# Altium PCB TIMER_COUNTER_PANEL.PcbDoc
Units mm, origin at the board's own origin, x right, y up, seen from the top; angles counter-clockwise.
Board outline 50 x 50 mm, 2 copper layers (Top Layer, Bottom Layer); 21 components, 24 nets, 105 pads, 173 vias.
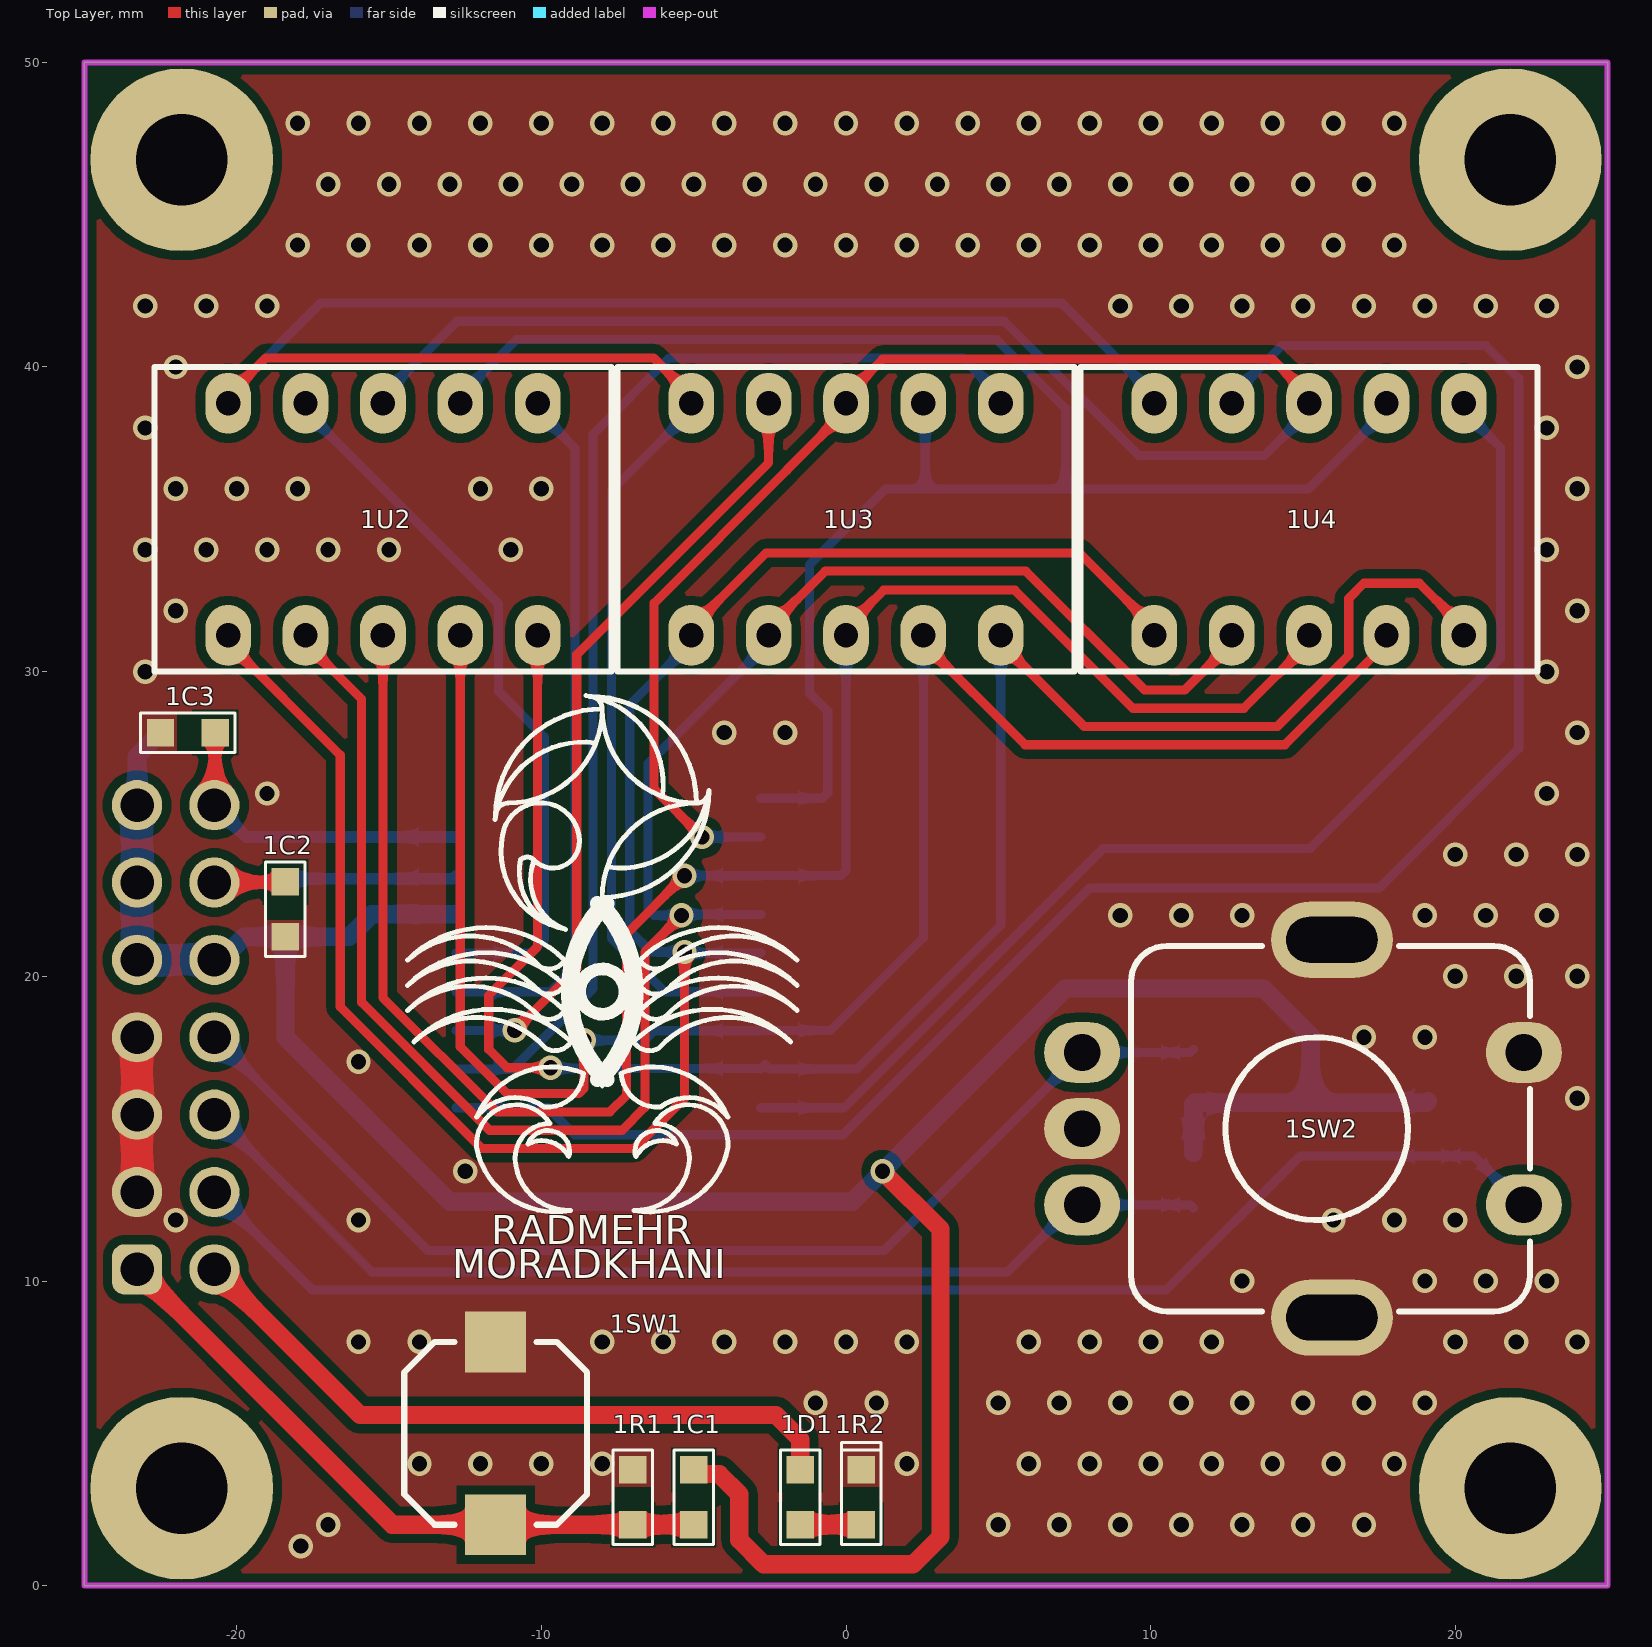
[diagram p0: Top Layer view]
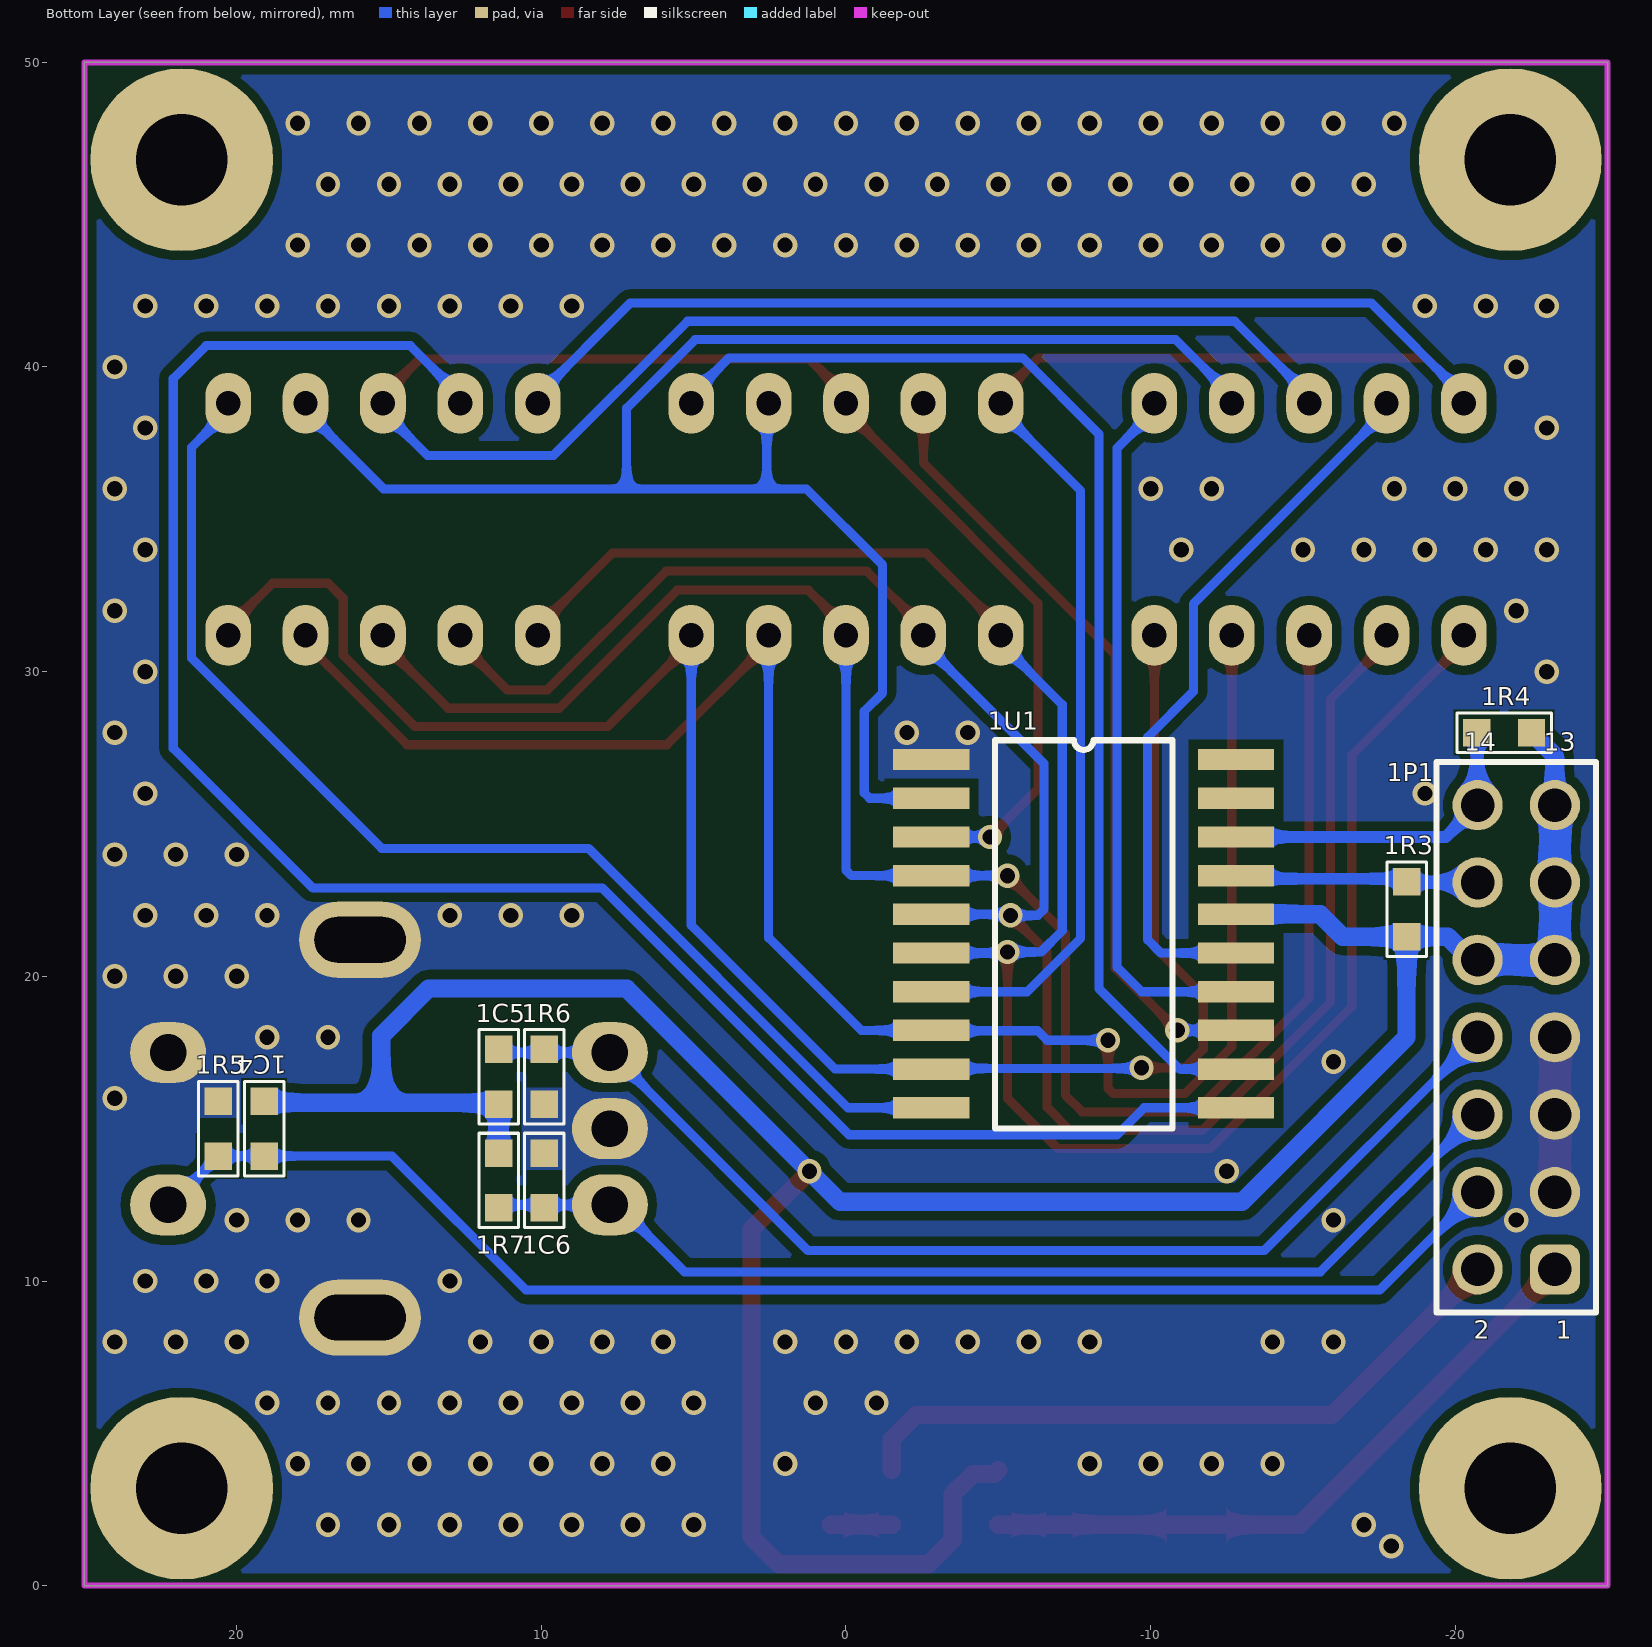
[diagram p1: Bottom Layer view, seen from below]
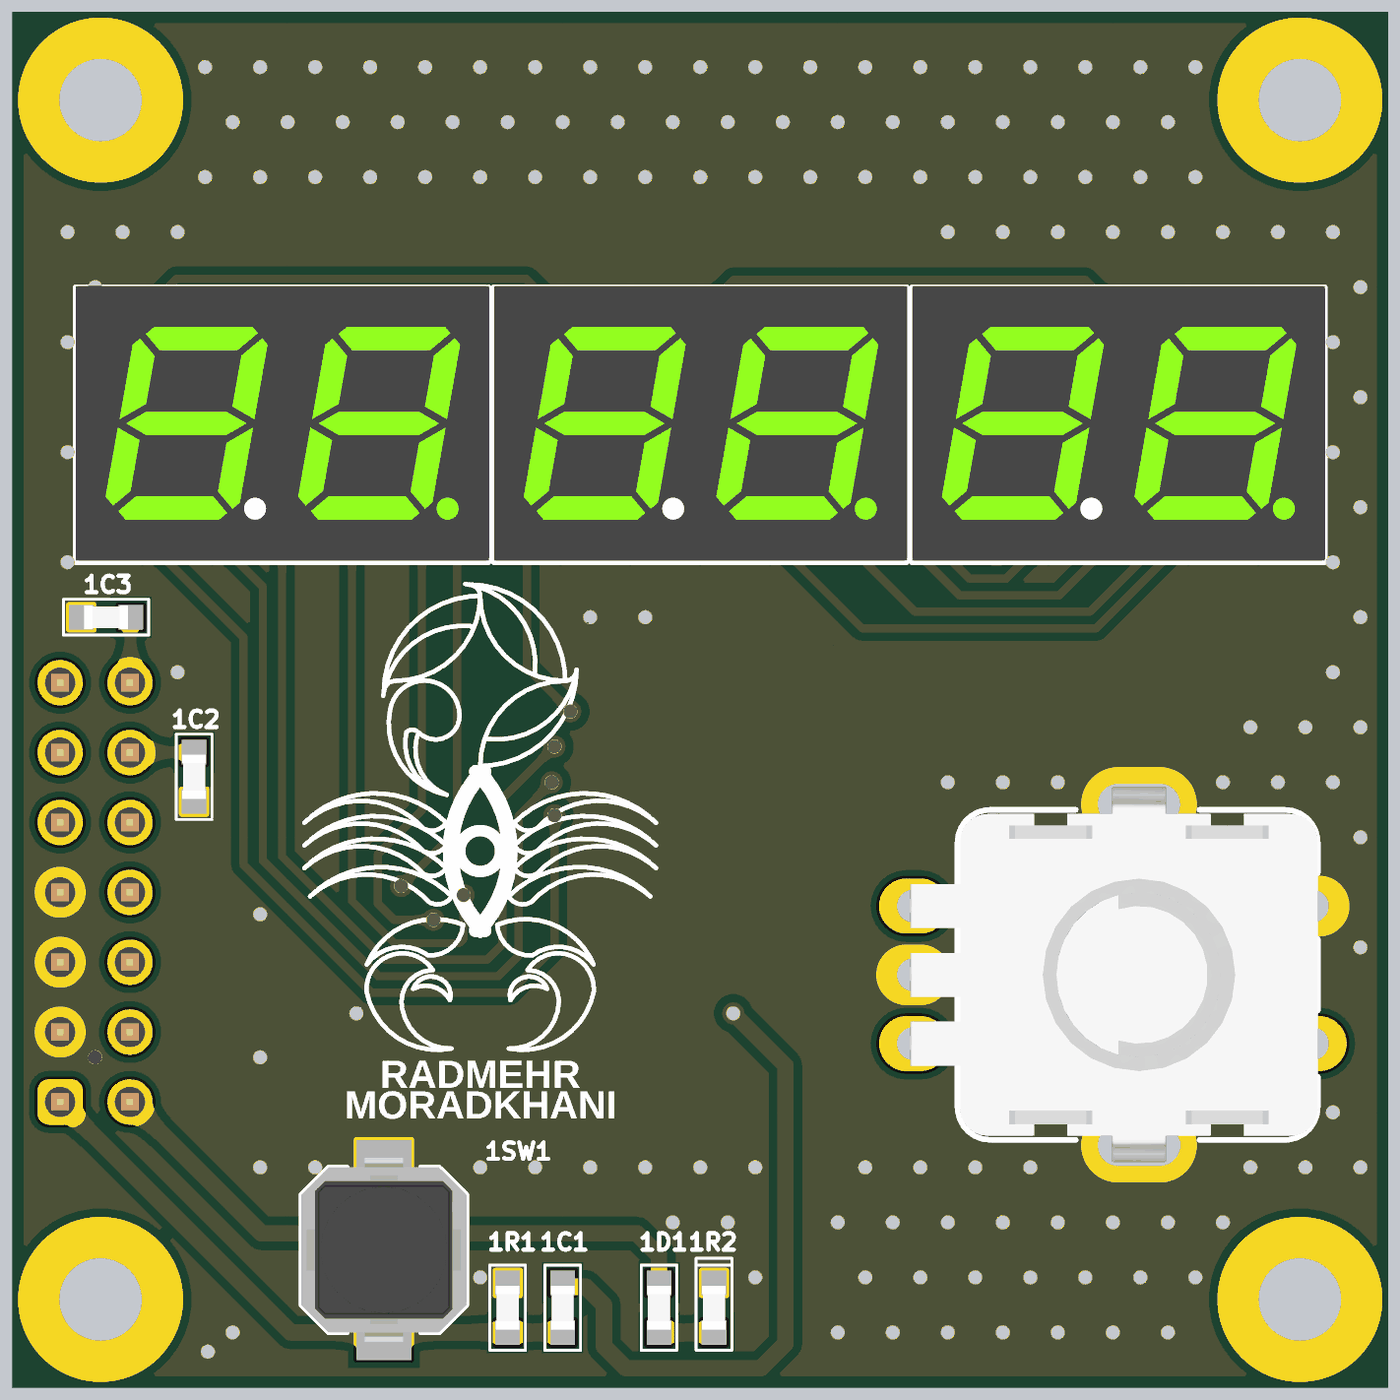
[diagram p2: 3D render of the assembled board from above, using the file's embedded part models]
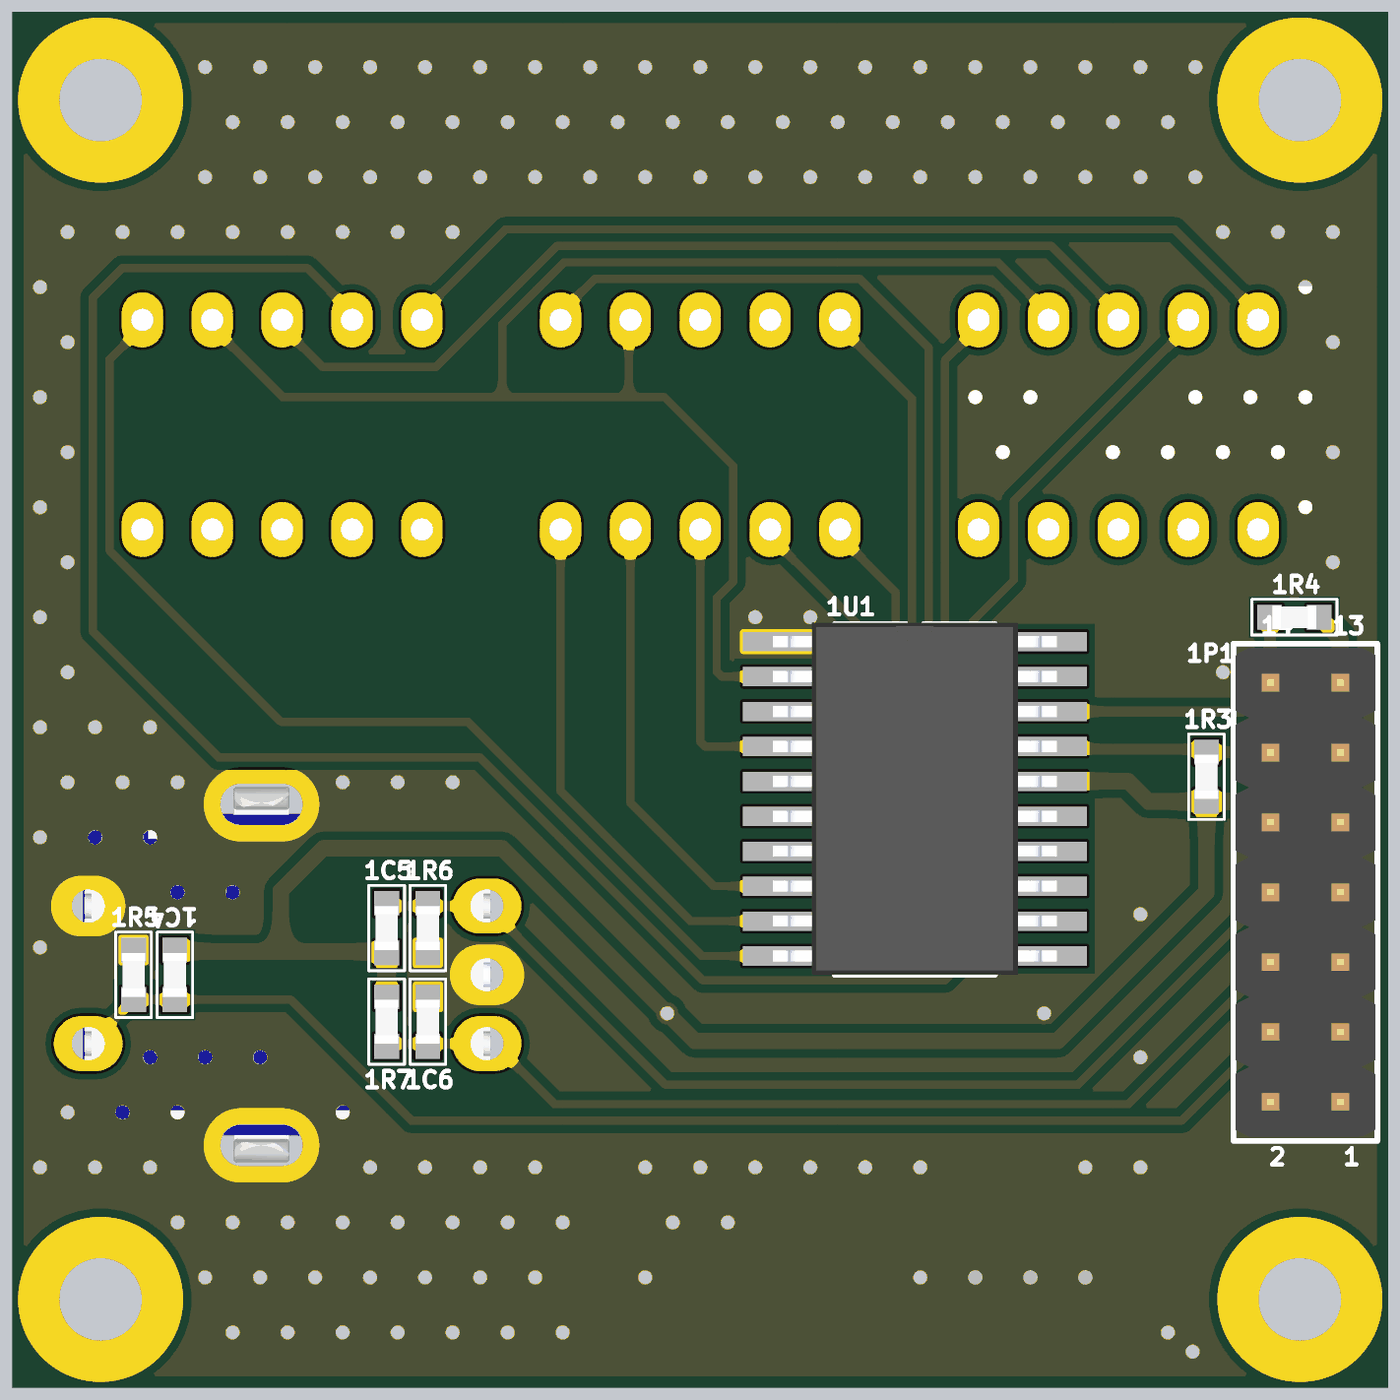
[diagram p3: 3D render of the assembled board from below, using the file's embedded part models]

## Layer stack, top to bottom
Top Solder: solder mask 0.0102, Solder Resist, Dk 3.5
Top Layer: signal copper 0.0356
Dielectric 1: dielectric 0.32, FR-4, Dk 4.8
Bottom Layer: signal copper 0.0356
Bottom Solder: solder mask 0.0102, Solder Resist, Dk 3.5

## Board outline
-25,0 25,0 25,50 -25,50

## Design rules (kind name [scope] priority, off if disabled: settings)
Clearance [All] p1: gap=0.3 ignorepadtopadclearanceinfootprint=FALSE except(0: Arc-Hole Track-Hole SMDPad-Hole THPad-Hole Via-Hole Fill-Hole Poly-Hole Region-Hole Text-Hole)
PlaneClearance [All] p1: clearance=0.5
PlaneConnect [All] p1: planeconnectstyle=Direct reliefexpansion=0.5 reliefentries=4 reliefconductorwidth=0.3 reliefairgap=0.3
PolygonConnect [All] p1: connectstyle=Direct reliefconductorwidth=0.254 reliefentries=4 polygonreliefangle="90 Angle" airgapwidth=0.254
RoomDefinition TIMER_COUNTER_PANEL_V2 [InComponentClass('TIMER_COUNTER_PANEL_V2')] p1: confinementstyle=ConfineIn formatcopy=TRUE lockcomponents=FALSE outline -95,-50 -44.2,-50 -44.2,-24.6 -95,-24.6
RoutingVias [All] p1: holewidth=0.5 width=0.8 viastyle="Through Hole" minholewidth=0.5 minwidth=0.8 maxholewidth=0.5 maxwidth=0.8
SolderMaskExpansion [All] p1: expansion=0.102 istentingtop=FALSE
Width [All] p1: maxlimit=1 minlimit=0.3 preferedwidth=0.6 minimp=50.000000 maximp=50.000000 favimp=50.000000
28 further rules are at their usual default settings.

## Components (designator, comment, footprint, x,y, rotation, side; value= is the part's Value field where it differs from the comment)
1C1 "CAP_SMD" "C 0603" -7,2.9 r270 top (schematic designator C1)
1C2 "CAP_SMD" "C 0603" -18.4,22.2 r90 top (schematic designator C2)
1C3 "CAP_SMD" "C 0603" -21.6,28 r0 top (schematic designator C3)
1C4 "CAP_SMD" "C 0603" 20.6,15 r270 bottom (schematic designator C4)
1C5 "CAP_SMD" "C 0603" 9.9,16.7 r90 bottom (schematic designator C5)
1C6 "CAP_SMD" "C 0603" 9.9,13.3 r270 bottom (schematic designator C6)
1D1 "LED_SMD" "D 0603" 0.5,2.9 r90 top (schematic designator D1)
1P1 "61301421121" 61301421121 -22,18 r90 bottom (schematic designator P1)
1R1 "RES_SMD" "R 0603" -5,2.9 r90 top (schematic designator R1)
1R2 "RES_SMD" "R 0603" -1.5,2.9 r270 top (schematic designator R2)
1R3 "RES_SMD" "R 0603" -18.4,22.2 r270 bottom (schematic designator R3)
1R4 "RES_SMD" "R 0603" -21.6,28 r180 bottom (schematic designator R4)
1R5 "RES_SMD" "R 0603" 19.1,15 r90 bottom (schematic designator R5)
1R6 "RES_SMD" "R 0603" 11.4,16.7 r270 bottom (schematic designator R6)
1R7 "RES_SMD" "R 0603" 11.4,13.3 r90 bottom (schematic designator R7)
1SW1 "430133050816" WS-TASV_L6W6H5_4301330508x6 -11.5,5 r270 top (schematic designator SW1)
1SW2 "Rotary_Encoder" Rotary_Encoder 15,15 r0 top (schematic designator SW2)
1U1 "TM1637" SOP-20 -7.8,21.4 r180 bottom (schematic designator U1)
1U2 "2281BS" 2281BS -15.2,35 r0 top (schematic designator U2)
1U3 "2281BS" 2281BS 0,35 r0 top (schematic designator U3)
1U4 "2281BS" 2281BS 15.2,35 r0 top (schematic designator U4)

## Footprints (in the part's own frame and the unit in brackets; to place one, negate y for a bottom-side part, rotate by r counter-clockwise, add the part's x,y. Pads: shape width x height; smd on the part's side, far side on the other; paste and mask are expansions set on the pad)
2281BS [mm] "U?"
  oval 1.5x2 hole 0.8: 1(-5.08,-3.81) 2(-2.54,-3.81) 3(0,-3.81) 4(2.54,-3.81) 5(5.08,-3.81) 6(5.08,3.81) 7(2.54,3.81) 8(0,3.81) 9(-2.54,3.81) 10(-5.08,3.81)
  silkscreen extent -7.5,-5 7.5,5, body extent -7.49,-4.95 7.53,5.05, height 6.35
61301421121 [mm] "Pin Header, pitch 2.54 mm, THT, Vertical, dual row, 14p"
  rrect50% 1.65x1.65 hole 1.1: 1(-7.62,-1.27)
  round 1.65 hole 1.1: 2(-7.62,1.27) 3(-5.08,-1.27) 4(-5.08,1.27) 5(-2.54,-1.27) 6(-2.54,1.27) 7(0,-1.27) 8(0,1.27) 9(2.54,-1.27) 10(2.54,1.27) 11(5.08,-1.27) 12(5.08,1.27) 13(7.62,-1.27) 14(7.62,1.27)
  silkscreen extent -9.04,-2.62 9.04,2.62, body extent -8.89,-2.54 8.89,2.54, height 8.59
"C 0603" [mm] "C?"
  rect 0.9x0.9 smd: 1(-0.9,0) 2(0.9,0)
  Top Layer pour cut-out: -0.35,0.6 0.35,0.6 0.35,-0.6 -0.35,-0.6
  silkscreen extent -1.55,-0.65 1.55,0.65, body extent -0.8,-0.43 0.8,0.43, height 0.52
"D 0603" [mm] "D?"
  rect 0.9x0.9 smd: 1(-0.9,0) 2(0.9,0)
  Top Layer pour cut-out: -0.35,0.6 0.35,0.6 0.35,-0.6 -0.35,-0.6
  silkscreen extent -1.55,-0.65 1.8,0.65, body extent -0.8,-0.43 0.8,0.43, height 0.52
"R 0603" [mm] "R?"
  rect 0.9x0.9 smd: 1(-0.9,0) 2(0.9,0)
  Top Layer pour cut-out: -0.35,0.6 0.35,0.6 0.35,-0.6 -0.35,-0.6
  silkscreen extent -1.55,-0.65 1.55,0.65, body extent -0.8,-0.43 0.8,0.43, height 0.52
Rotary_Encoder [mm] "SW?"
  oval 2.5x2 hole 1.2: 1(-7.25,2.5) 2(-7.25,0) 3(-7.25,-2.5) 4(7.25,-2.5) 5(7.25,2.5)
  oval 4x2.5 hole 1.5 slot 3 at 0 deg: 6(0.95,6.2) 7(0.95,-6.2)
  silkscreen extent -5.65,-6 7.45,6, body extent -7.38,-6.81 7.45,6.84, height 21.2
SOP-20 [mm] "U?"
  rect 2.5x0.7 smd: 1(-5,5.715) 2(-5,4.445) 3(-5,3.175) 4(-5,1.905) 5(-5,0.635) 6(-5,-0.635) 7(-5,-1.905) 8(-5,-3.175) 9(-5,-4.445) 10(-5,-5.715) 11(5,-5.715) 12(5,-4.445) 13(5,-3.175) 14(5,-1.905) 15(5,-0.635) 16(5,0.635) 17(5,1.905) 18(5,3.175) 19(5,4.445) 20(5,5.715)
  silkscreen extent -2.92,-6.4 2.92,6.35, body extent -5.16,-6.4 5.16,6.4, height 2.96
WS-TASV_L6W6H5_4301330508x6 [mm] "Tact Switch, SMT, body 6x6mm"
  rect 2x2 smd: 1(-3,0) 2(3,0)
  silkscreen extent -3,-3 3,3, body extent -3.35,-3 3.35,3, height 5

## Part data
1P1: "WR-PHD Pin Header, THT, pitch 2.54mm, Dual Row, Vertical, 14p", Contact Resistance=20mOhm, Manufacturer="Wurth Elektronik", Operating Temperature="-40 to +105degC", Rated Current=3A, Withstanding Voltage=500VAC, Working Voltage=250VAC, ComponentLink1Description=Manufacturer, ComponentLink1URL=http://www.we-online.de, ComponentLink2Description=Datasheet, ComponentLink2URL=https://www.we-online.com/catalog/datasheet/61301421121.pdf, Gender="Pin Header", Manufacturer Part Number=61301421121, Mounting Technology=THT, Orientation=Vertical, Packaging=Bag, Pin Number=14, Pitch=2.54mm, Row Number=Dual
1SW1: "WS-TASV SMT long travel tact switch, L6 x W6 x H5mm, 160g, SPST-NO, 16V, 50mA", Manufacturer="Wurth Elektronik", Operating Temperature Max=125°C, Operating Temperature Min=-40°C, Rated Current=50mA, Rated Voltage (DC)=16V, Category="Tact Switches", Circuit=SPST-NO, ComponentLink1Description="Website Link", ComponentLink1URL=https://www.we-online.com/redexpert/article/430133050816?ad, ComponentLink2Description="Datasheet Link", ComponentLink2URL=https://www.we-online.com/redexpert/spec/430133050816?ad, Contact Material="Stainless Steel", Contact Plating=Silver, Height=5mm, Length=6mm, Manufacturer Part Number=430133050816, Match Code=WS-TASV, Mount="Surface Mount", Operation Force=160g, Packaging="Tape and Reel", Terminal Material="Copper Alloy", Terminal Plating=Silver, Washable=No, Width=6mm

## Free pads (board coordinates)
  round 6 hole 3 mask+0: ""(-21.8,3.2) ""(-21.8,46.8) ""(21.8,3.2) ""(21.8,46.8)

## Via types
v1: diameter 0.8, hole 0.5, Top Layer to Bottom Layer, tented both sides, 173 vias

## Nets (pads, with @x,y where several pads share a name; then routed paths per layer and width w, separated by ;. In a path a pad name is that pad's centre, name@x,y a point inside that pad or via, vN(x,y) a via of type N, cw(c..) or ccw(c..) an arc to the next point about the centre after c; other vN are vias at no path point)
+3V3: 1P1.9 1P1.10 1P1.11 1P1.13 1R1.2 1R3.2 1R4.2 1R5.2 1R6.2 1R7.2 1U1.16 | length 96.6
  Top Layer w0.6: 1R1.2 -4.864,3.664 -4.164,3.664 -3.5,3 -3.5,1.5 -2.7,0.7 2.2,0.7 3.1,1.6 3.1,11.7 v1(1.2,13.6)
  Bottom Layer w0.6: 1P1.13 -23.27,27.23 1R4.2 ; 1P1.10 -20.51,20.54 -19.75,21.3 1R3.2 ; 1U1.16 -15.565,22.035 -16.3,21.3 1R3.2 ; 1R7.2 1R6.2 11.45,15.85 15.25,15.85 ; 1R5.2 19.05,15.85 15.25,15.85 ; 1R3.2 -18.4,18 -13,12.6 0.2,12.6 v1(1.2,13.6) 7.2,19.6 13.7,19.6 15.25,18.05 15.25,15.85
  Bottom Layer w1: 1P1.13 1P1.11 1P1.9 1P1.10
GND: 1C1.1 1C2.1 1C3.1 1C4.1 1C5.1 1C6.1 1D1.2 1P1.3 1P1.5 1P1.7 1SW1.1 1SW2.2 1SW2.5 1SW2.6 1SW2.7 1U1.1 | length 5.1
  Top Layer w1: 1P1.3 1P1.5 1P1.7
  other v1: -17.9,1.3 -17,2 5,2 7,2 9,2 11,2 13,2 15,2 17,2 -14,4 -12,4 -10,4 -8,4 2,4 6,4 8,4 10,4 12,4 14,4 16,4 18,4 -1,6 1,6 5,6 7,6 9,6 11,6 13,6 15,6 17,6 19,6 -16,8 -14,8 -8,8 -6,8 -4,8 -2,8 0,8 2,8 6,8 8,8 10,8 12,8 20,8 22,8 24,8 13,10 19,10 21,10 23,10 -22,12 -16,12 16,12 18,12 20,12 -12.5,13.6 24,16 -16,17.2 17,18 19,18 20,20 22,20 24,20 9,22 11,22 13,22 19,22 21,22 23,22 20,24 22,24 24,24 -19,26 23,26 -4,28 -2,28 24,28 -23,30 23,30 -22,32 24,32 -23,34 -21,34 -19,34 -17,34 -15,34 -11,34 23,34 -22,36 -20,36 -18,36 -12,36 -10,36 24,36 -23,38 23,38 -22,40 24,40 -23,42 -21,42 -19,42 9,42 11,42 13,42 15,42 17,42 19,42 21,42 23,42 -18,44 -16,44 -14,44 -12,44 -10,44 -8,44 -6,44 -4,44 -2,44 0,44 2,44 4,44 6,44 8,44 10,44 12,44 14,44 16,44 18,44 -17,46 -15,46 -13,46 -11,46 -9,46 -7,46 -5,46 -3,46 -1,46 1,46 3,46 5,46 7,46 9,46 11,46 13,46 15,46 17,46 -18,48 -16,48 -14,48 -12,48 -10,48 -8,48 -6,48 -4,48 -2,48 0,48 2,48 4,48 6,48 8,48 10,48 12,48 14,48 16,48 18,48
KEY: 1C1.2 1P1.1 1R1.1 1SW1.2 | length 21.7
  Top Layer w0.6: 1P1.1 -14.89,2 1SW1.2 1C1.2 1R1.1
LED: 1P1.2 1R2.1 | length 22.5
  Top Layer w0.6: 1P1.2 -15.95,5.6 -2.3,5.6 -1.5,4.8 1R2.1
Net1D1_1: 1D1.1 1R2.2 | length 2
  Top Layer w0.6: 1R2.2 1D1.1
RE_A: 1C5.2 1P1.8 1R6.1 1SW2.1 | length 37.8
  Bottom Layer w0.3: 1P1.8 -13.73,11 1.25,11 1SW2.1 9.9,17.5 11.3,17.5 1R6.1
RE_B: 1C6.2 1P1.6 1R7.1 1SW2.3 | length 35.2
  Bottom Layer w0.3: 1P1.6 -15.57,10.3 5.3,10.3 7.5,12.5 1SW2.3 11.3,12.5 1R7.1
RE_SW: 1C4.2 1P1.4 1R5.1 1SW2.4 | length 46.8
  Bottom Layer w0.3: 1P1.4 -17.51,9.7 10.5,9.7 14.9,14.1 1R5.1 1C4.2 22.2,12.5 1SW2.4
SEL1: 1U1.15 1U2.9 | length 23.9
  Bottom Layer w0.3: 1U2.9 -17.74,38.56 -11.4,32.22 -11.4,29.348 -9.9,27.848 -9.9,21.2 -10.335,20.765 1U1.15
SEL2: 1U1.14 1U2.6 | length 23.2
  Bottom Layer w0.3: 1U1.14 -9.705,19.495 -8.9,20.3 -8.9,37.34 -10.12,38.56 1U2.6
SEL3: 1U1.13 1U3.9 | length 26
  Top Layer w0.3: v1(-10.875,18.227) -10.873,18.227 -8.84,20.26 -8.84,30.56 -2.54,36.86 1U3.9
  Bottom Layer w0.3: 1U1.13 -12.799,18.226 v1(-10.875,18.227) v1(-10.875,18.227)
SEL4: 1U1.12 1U3.6 | length 39
  Bottom Layer w0.3: 1U1.12 -10.945,16.955 -8.3,19.6 -8.3,37.8 -5.8,40.3 3.84,40.3 5.08,39.06 1U3.6
SEL5: 1U1.11 1U4.9 | length 63.4
  Bottom Layer w0.3: 1U1.11 -9.785,15.685 -8.9,14.8 -0.1,14.8 8,22.9 17.5,22.9 22.08,27.48 22.08,39.62 21,40.7 14.3,40.7 12.66,39.06 1U4.9
SEL6: 1U1.10 1U4.6 | length 39.3
  Bottom Layer w0.3: 1U1.10 -0.064,15.685 8.451,24.2 15.237,24.2 21.48,30.443 21.48,37.36 20.28,38.56 1U4.6
SG_A: 1U1.2 1U2.7 1U3.7 1U4.7 | length 58.6
  Bottom Layer w0.3: 1U2.7 -12.66,39.06 -10.82,40.9 4.951,40.9 7.2,38.651 7.2,36 ; 1U1.2 -0.776,25.845 -0.6,26.021 -0.6,28.7 -1.2,29.3 -1.2,33.5 1.3,36 2.6,36 ; 1U3.7 2.6,38.75 2.6,36 ; 1U4.7 17.74,38.56 15.18,36 7.2,36 ; 2.6,36 7.2,36
SG_B: 1U1.3 1U2.8 1U3.8 1U4.8 | length 70.7
  Top Layer w0.3: v1(-4.725,24.575) -6.3,26.15 -6.3,32.251 -1.94,36.611 -1.94,36.62 0,38.56 0,39.06 1.2,40.26 14,40.26 15.2,39.06 1U4.8
  Bottom Layer w0.3: 1U2.8 -15.2,39.06 -12.76,41.5 5.2,41.5 9.6,37.1 13.74,37.1 15.2,38.56 1U4.8 ; v1(-4.725,24.575) 1U1.3 ; 1U3.8@0,38.56 1U3.8
SG_C: 1U1.4 1U2.3 1U3.3 1U4.3 | length 61.4
  Top Layer w0.3: 1U2.3 -15.2,19.3 -11.45,15.55 -7.75,15.55 -7.2,16.1 -7.2,21.4 v1(-5.3,23.3) ; 1U3.3 0,31.44 1.236,32.676 5.541,32.676 9.417,28.8 13.06,28.8 15.2,30.94 1U4.3
  Bottom Layer w0.3: v1(-5.3,23.3) -5.297,23.303 -2.803,23.303 1U1.4 -0.176,23.305 0,23.481 1U3.3
SG_D: 1U1.5 1U2.2 1U3.2 1U4.2 | length 64.1
  Top Layer w0.3: 1U2.2 -17.74,30.94 -15.9,29.1 -15.9,19.149 -11.701,14.95 -7.35,14.95 -6.6,15.7 -6.6,20.798 v1(-5.399,21.999) ; 1U3.2 -2.54,31.44 -0.68,33.3 5.9,33.3 9.8,29.4 11.12,29.4 12.66,30.94 1U4.2
  Bottom Layer w0.3: v1@-5.4,22.035 1U1.5 ; v1(-5.399,21.999) v1(-5.399,21.999) -6.3,22 -6.5,22.2 -6.5,26.98 -2.54,30.94 1U3.2
SG_DP: 1U1.9 1U2.5 1U3.5 1U4.5 | length 63.4
  Top Layer w0.3: 1U2.5 -10.12,20.98 -11.725,19.375 -11.725,17.601 -11.124,17 v1(-9.698,17) ; 1U3.5 5.08,30.94 7.82,28.2 14.157,28.2 16.5,30.543 16.5,32.4 17,32.9 18.82,32.9 20.28,31.44 1U4.5
  Bottom Layer w0.3: v1(-9.698,17) -9.675,16.978 -2.822,16.978 1U1.9 -2.655,17.1 -2.51,16.955 0.358,16.955 5.08,21.677 1U3.5
SG_E: 1U1.6 1U2.1 1U3.1 1U4.1 | length 65.3
  Top Layer w0.3: 1U2.1 -20.28,30.94 -16.6,27.26 -16.6,19 -11.95,14.35 -6.95,14.35 -5.3,16 v1(-5.3,20.8) ; 1U3.1 -5.08,31.44 -2.62,33.9 7.66,33.9 10.12,31.44 1U4.1
  Bottom Layer w0.3: v1@-5.2,20.765 1U1.6 ; v1@-5.2,20.9 v1(-5.3,20.8) -6.4,20.8 -7.1,21.5 -7.1,28.92 -5.08,30.94 1U3.1
SG_F: 1U1.7 1U2.10 1U3.10 1U4.10 | length 74.4
  Top Layer w0.3: 1U2.10 -20.28,39.06 -19.04,40.3 -6.32,40.3 -5.08,39.06 1U3.10
  Bottom Layer w0.3: 1U2.10 -20.28,39.06 -17.24,42.1 7.08,42.1 10.12,39.06 1U4.10 ; 1U3.10 -5.08,38.56 -7.7,35.94 -7.7,21.251 -5.944,19.495 1U1.7
SG_G: 1U1.8 1U2.4 1U3.4 1U4.4 | length 60.8
  Top Layer w0.3: 1U2.4 -12.66,17.687 -11.123,16.15 -8.776,16.15 -8.6,16.326 v1(-8.6,17.9) ; 1U3.4 2.54,30.94 5.88,27.6 14.406,27.6 17,30.194 17,30.2 17.74,30.94 1U4.4
  Bottom Layer w0.3: v1(-8.6,17.9) -6.6,17.9 -6.288,18.212 -2.813,18.212 1U1.8 -0.503,18.225 2.54,21.268 1U3.4
TM1637_CLK: 1C3.2 1P1.14 1R4.1 1U1.18 | length 13.1
  Top Layer w0.381: 1P1.14 -20.715,25.635 -20.715,27.985 1C3.2
  Bottom Layer w0.381: 1R4.1 -20.715,27.985 -20.715,25.635 1P1.14 -19.685,24.575 1U1.18
TM1637_DIO: 1C2.2 1P1.12 1R3.1 1U1.17 | length 10.4
  Top Layer w0.381: 1P1.12 -20.72,23.09 -18.41,23.09 1C2.2
  Bottom Layer w0.381: 1P1.12 -20.72,23.09 -18.41,23.09 1R3.1 -18.297,23.203 -12.903,23.203 1U1.17
pads on no net: 1U1.19 1U1.20

## Polygon pours and split planes (outlines as drawn)
GND on Bottom Layer "NONET_L-01_P-001" (solid, remove dead copper, pour order 1): -25,50 25,50 25,0 -25,0
GND on Top Layer "NONET_L-01_P-001" (solid, remove dead copper, pour order 0): -25,50 25,50 25,0 -25,0

## Keep-outs
Keep-Out Layer:
  the board outline again, w0.2

## Silkscreen, mask and mechanical layers (free items; w line width, h text height)
Top Overlay:
  circle w0.412: c-8,19.5 r0.742
  lines w0.162: -11.525,25.147 cw(c-8.618,24.755) -8.226,27.662 ; -10.243,23.811 ccw(c-8.594,23.192) -9.212,21.543 ; -8.539,29.211 cw(c-8.931,26.303) -6.023,25.912 ; -7.794,23.583 ccw(c-7.402,26.49) -4.495,26.098 ; -9.212,21.543 cw(c-8.803,23.421) -10.68,23.83 cw(c-10.469,23.602) -10.24,23.814 ccw(c-9.62,24.423) -8.751,24.438 ccw(c-10.021,24.426) -11.274,24.636 ccw(c-8.697,24.12) -9.212,21.543 ; -8,22.593 ccw(c-8,26.098) -4.495,26.098 ; -8,22.593 cw(c-4.907,22.593) -4.907,25.686 ; -8,22.593 cw(c-11.093,19.5) -8,16.407 cw(c-4.907,19.5) -8,22.593 ; -8,28.779 ccw(c-8,25.273) -11.505,25.273 cw(c-11.093,25.273) -11.093,25.686 ccw(c-11.093,28.779) -8,28.779 ; -8,28.779 ccw(c-8.412,28.779) -8.412,29.191 cw(c-8.412,25.686) -4.907,25.686 ; -8,28.779 ccw(c-4.907,28.779) -4.907,25.686 ; -4.907,25.686 ccw(c-4.907,26.098) -4.495,26.098 ; -14.392,18.881 cw(c-11.815,16.304) -9.237,18.881 cw(c-9.753,19.191) -10.062,18.675 ccw(c-12.33,16.613) -14.392,18.881 ; -14.392,19.706 cw(c-11.815,17.129) -9.237,19.706 cw(c-9.753,20.015) -10.062,19.5 ccw(c-12.33,17.438) -14.392,19.706 ; -14.392,20.531 cw(c-11.815,17.954) -9.237,20.531 cw(c-9.753,20.84) -10.062,20.325 ccw(c-12.33,18.263) -14.392,20.531 ; -14.186,17.85 cw(c-11.608,15.273) -9.031,17.85 cw(c-9.546,18.16) -9.856,17.644 ccw(c-12.124,15.582) -14.186,17.85 ; -12.13,14.389 cw(c-10.829,14.481) -9.722,15.171 ccw(c-9.717,14.027) -10.861,14.021 ccw(c-9.101,14.081) -9.041,12.32 cw(c-9.551,14.899) -12.13,14.389 ; -12.124,15.376 cw(c-9.65,14.345) -8.619,16.82 cw(c-9.814,16.902) -9.897,15.706 ccw(c-10.845,14.428) -12.124,15.376 ; -10.44,14.49 cw(c-9.791,14.25) -9.551,14.899 cw(c-9.735,14.265) -9.101,14.081 ccw(c-9.975,13.616) -10.44,14.49 ; -7.381,16.82 ccw(c-6.186,16.902) -6.103,15.706 cw(c-5.155,14.428) -3.876,15.376 ccw(c-6.35,14.345) -7.381,16.82 ; -6.969,17.85 ccw(c-6.454,18.16) -6.144,17.644 cw(c-3.876,15.582) -1.814,17.85 ccw(c-4.392,15.273) -6.969,17.85 ; -6.959,12.32 ccw(c-6.449,14.899) -3.87,14.389 ccw(c-5.171,14.481) -6.278,15.171 cw(c-6.283,14.027) -5.139,14.021 cw(c-6.899,14.081) -6.959,12.32 ; -6.899,14.081 cw(c-6.265,14.265) -6.449,14.899 cw(c-6.209,14.25) -5.56,14.49 ccw(c-6.025,13.616) -6.899,14.081 ; -6.763,18.881 ccw(c-6.247,19.191) -5.938,18.675 cw(c-3.67,16.613) -1.608,18.881 ccw(c-4.185,16.304) -6.763,18.881 ; -6.763,19.706 ccw(c-6.247,20.015) -5.938,19.5 cw(c-3.67,17.438) -1.608,19.706 ccw(c-4.185,17.129) -6.763,19.706 ; -6.763,20.531 ccw(c-6.247,20.84) -5.938,20.325 cw(c-3.67,18.263) -1.608,20.531 ccw(c-4.185,17.954) -6.763,20.531
  lines w0.487: -8.165,16.613 ccw(c-11.052,19.5) -8.165,22.387 ; -7.835,16.613 cw(c-4.948,19.5) -7.835,22.387
  text "RADMEHR" at -11.645,10.895 h1.62
  text "MORADKHANI" at -12.931,9.778 h1.62

## Text inside footprints (layer, text, board x,y; h text height)
1P1: Bottom Overlay "14" at -20.3,27.4 h0.6; Bottom Overlay "13" at -22.9,27.4 h0.6; Bottom Overlay "1" at -23.3,8.1 h0.6; Bottom Overlay "2" at -20.6,8.1 h0.6